# EAGLE board Shield_Slave_2_layers (EAGLE 9.1.0)
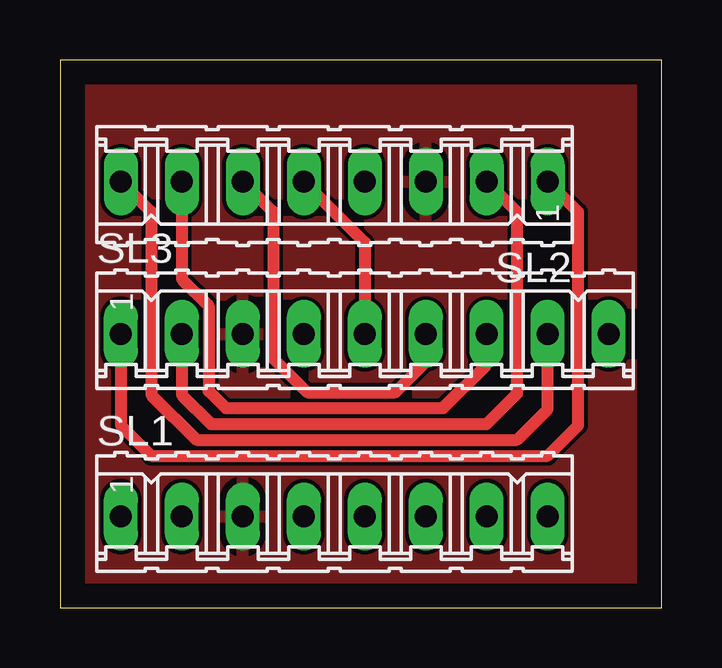
[diagram p0: board, top side]
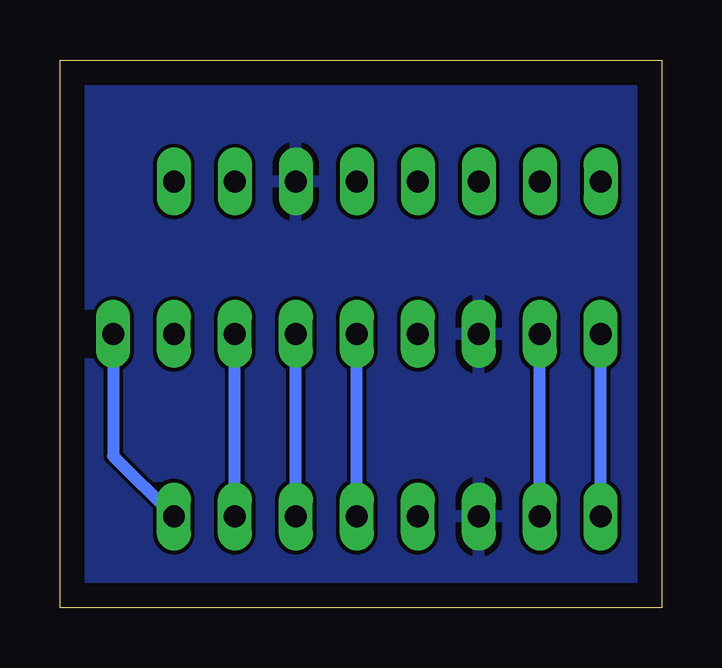
[diagram p1: board, bottom side, seen from below]

Size 25.07 x 22.85 mm. Coordinates in mm from the lower left corner, seen from the top.
Outline: 0,0 25.07,0 25.07,22.85 0,22.85 0,0
Copper layers (1*16): Top 0.035mm / dielectric 1.5mm / Bottom 0.035mm
Design rules "default": minimum track width 6mil, minimum drill 0.35mm, track to track 6mil, track to pad 6mil, pad to pad 6mil, via to via 6mil, smd to smd 6mil, copper to edge 40mil, drill to drill 6mil, minimum pad ring 10mil, minimum via ring 8mil, stop-mask expansion 4mil, vias tented up to drill 0mil, thermal gap 10mil

## Footprints (pad centres in the part's own frame; a part is rotated, then mirrored left to right if it is on the bottom)
08P = drill 0.914 long: 1 -8.89,0; 2 -6.35,0; 3 -3.81,0; 4 -1.27,0; 5 1.27,0; 6 3.81,0; 7 6.35,0; 8 8.89,0
09P = drill 0.914 long: 1 -10.16,0; 2 -7.62,0; 3 -5.08,0; 4 -2.54,0; 5 0,0; 6 2.54,0; 7 5.08,0; 8 7.62,0; 9 10.16,0

## Placement (x,y rotation side)
SL1  [08P]  11.43,3.81 0 top
SL2  [08P]  11.43,17.78 180 top
SL3  [09P]  12.7,11.43 0 top

## Library data of the parts
SL1-SL3 = con-amp-quick; OC_FARNELL: unknown; OC_NEWARK: unknown

## Nets
3V3: SL1.1 SL2.1 SL3.1
GND: SL1.3 SL2.3 SL3.3
MISO: SL1.5 SL2.5 SL3.5
MOSI: SL1.6 SL2.6 SL3.6
RST: SL1.2 SL2.2 SL3.2
SCK: SL1.7 SL2.7 SL3.7
SDA1: SL2.8 SL3.8
SDA2: SL1.8 SL3.9

## Tracks (layer width: path | path; a pad name or v marks a point on that pad's centre or on a via)
3V3
  Top 0.508: SL3.1 2.54,7.62 3.81,6.35 20.32,6.35 21.59,7.62 21.59,16.51 SL2.1
  Bottom 0.508: SL1.1 SL3.1
GND
  pour Top: 0,22.86 0,0 25.4,0 25.4,22.86
  pour Bottom: 0,22.86 0,0 25.4,0 25.4,22.86
MISO
  Top 0.508: SL2.5 12.7,15.24 SL3.5
  Bottom 0.508: 12.7,10.16 SL3.5 SL1.5
MOSI
  Top 0.508: SL2.6 8.89,16.51 8.89,10.41 10.31,8.99 13.97,8.99 15.24,10.26 SL3.6
  Bottom 0.508: SL1.6 SL3.6
RST
  Top 0.508: SL3.2 5.08,8.89 6.3,7.67 17.78,7.67 19.05,8.94 19.05,16.51 SL2.2
  Bottom 0.508: SL1.2 SL3.2
SCK
  Top 0.508: SL2.7 5.08,13.72 6.2,12.6 6.2,9.04 6.91,8.33 15.95,8.33 17.78,10.16 SL3.7
  Bottom 0.508: SL1.7 SL3.7
SDA1
  Top 0.508: SL2.8 3.81,16.51 3.81,8.89 5.69,7.01 19.05,7.01 20.32,8.28 SL3.8
SDA2
  Bottom 0.508: SL3.9 22.86,6.35 SL1.8